# EAGLE board Headphone-Amplifier-ClassAB-alt4 (EAGLE 7.2.0)
4x4 - Three Transistor Headphone Amplifier - Class AB http://www.electronics-diy.com/4x4.php
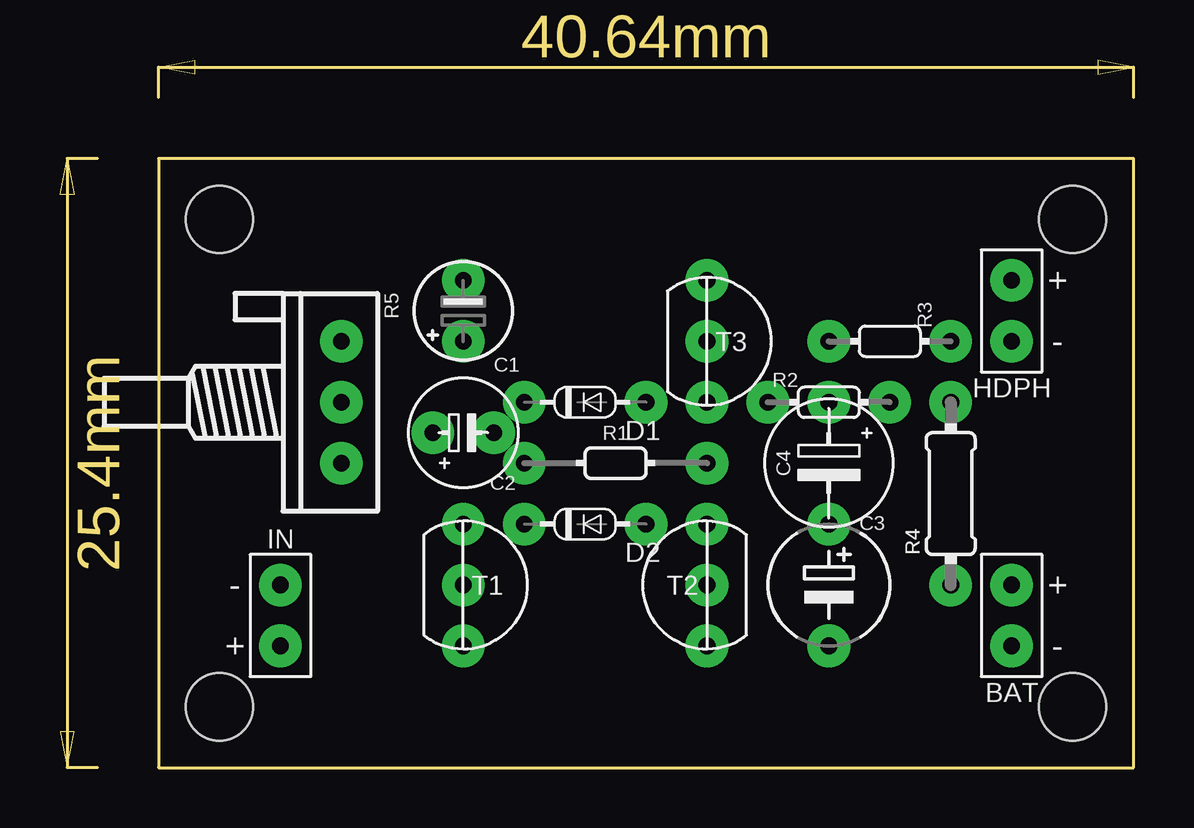
[diagram p0: board, top side]
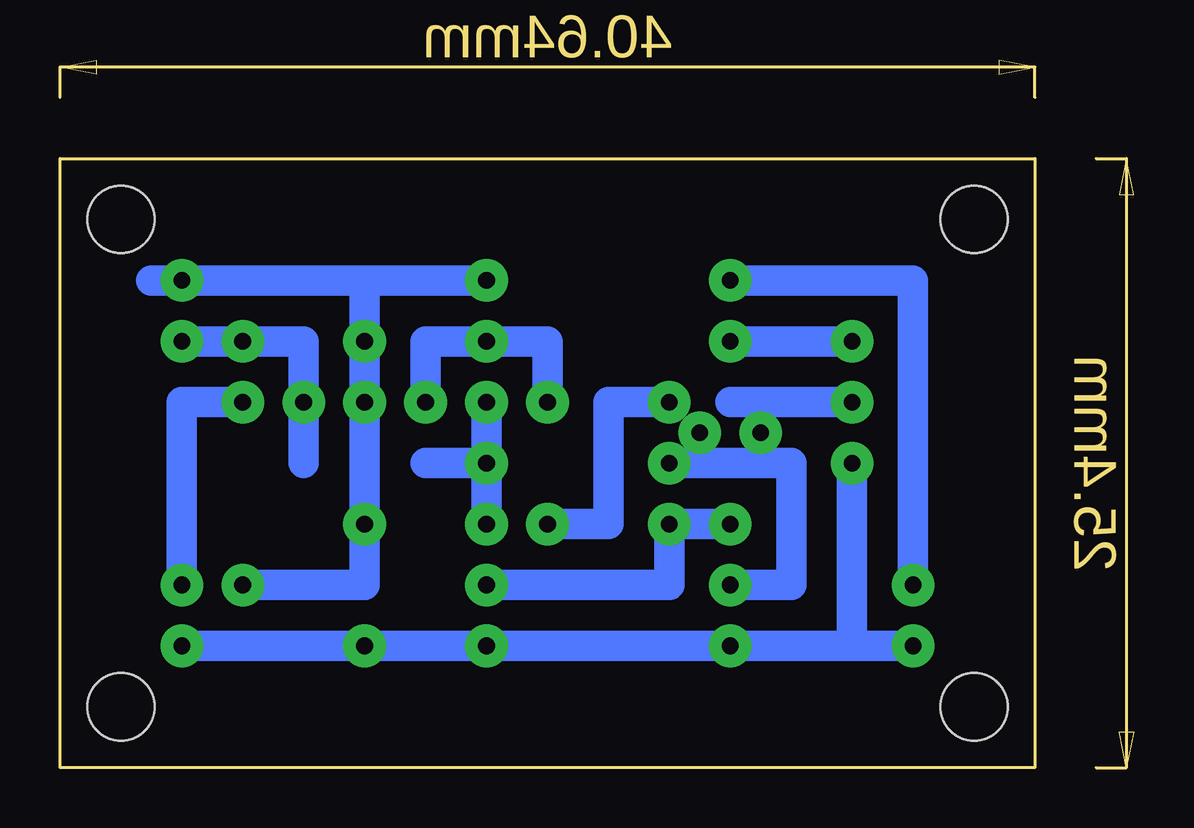
[diagram p1: board, bottom side, seen from below]

Size 40.64 x 25.4 mm. Coordinates in mm from the lower left corner, seen from the top.
Outline: 0,25.4 0,0 40.64,0 40.64,25.4 0,25.4
Copper layers (1*16): Top 0.035mm / dielectric 1.5mm / Bottom 0.035mm
Design rules "default": minimum track width 10mil, minimum drill 24mil, track to track 8mil, track to pad 8mil, pad to pad 8mil, via to via 8mil, smd to smd 8mil, copper to edge 40mil, drill to drill 8mil, minimum pad ring 10mil, minimum via ring 8mil, stop-mask expansion 4mil, vias tented up to drill 0mil, thermal gap 10mil
Net classes: 0 default: width 0.61 mm
Holes 2.8 mm at 2.54,22.86 2.54,2.54 38.1,22.86 38.1,2.54

## Footprints (pad centres in the part's own frame; a part is rotated, then mirrored left to right if it is on the bottom)
SPAD+- = drill 0.7 pad 1.778: 1 0,-1.27; 2 0,1.27
E2.5-4/V = drill 0.7 pad 1.778: + 0,1.27; - 0,-1.27
E2,5-4 = drill 0.7 pad 1.778: + 1.27,0; - -1.27,0
E5-5/V = drill 0.7 pad 1.778: + 0,2.54; - 0,-2.54
E5-4 = drill 0.7 pad 1.778: + -2.54,0; - 2.54,0
DO34-5 = drill 0.7 pad 1.778: A 2.54,0; C -2.54,0
0202/7 = drill 0.7 pad 1.778: 1 -3.81,0; 2 3.81,0
0202/5 = drill 0.7 pad 1.778: 1 -2.54,0; 2 2.54,0
0202/5-V = drill 0.7 pad 1.778: 1 0,2.54; 2 0,-2.54
0204/7 = drill 0.7 pad 1.778: 1 -3.81,0; 2 3.81,0
POT = drill 0.7 pad 1.778: A -2.54,0; E 2.54,0; S 0,0
TO92-CBE = drill 0.7 pad 1.778: B 0,0; C 0,2.54; E 0,-2.54

## Placement (x,y rotation side)
BAT  SPAD+-+-  [SPAD+-]  35.56,6.35 0 top
C1  4.7uF  [E2.5-4/V]  12.7,19.05 180 top
C2  4.7uF  [E2,5-4]  12.7,13.97 180 top
C3  100-1000uF  [E5-5/V]  27.94,7.62 0 top
C4  220uF  [E5-4]  27.94,12.7 270 top
D1  1N4148  [DO34-5]  17.78,15.24 0 top
D2  1N4148  [DO34-5]  17.78,10.16 0 top
HDPH  SPAD+-+-  [SPAD+-]  35.56,19.05 0 top
IN  SPAD+-+-  [SPAD+-]  5.08,6.35 180 top
R1  100k  [0202/7]  19.05,12.7 0 top
R2  330  [0202/5]  27.94,15.24 0 top
R3  100  [0202/5-V]  30.48,17.78 270 top
R4  22  [0204/7]  33.02,11.43 90 top
R5  100k  [POT]  7.62,15.24 270 top
T1  BC547  [TO92-CBE]  12.7,7.62 0 top
T2  BC557  [TO92-CBE]  22.86,7.62 180 top
T3  BC547  [TO92-CBE]  22.86,17.78 0 top

## Library data of the parts
BAT HDPH IN = pad
C1-C4 = c
D1 D2 = d
R1-R5 = r
T1-T3 = t

## Nets
GND: BAT.1 C3.- IN.2 R5.E T1.E T2.C
N$1: D1.A R2.1 T3.B
N$2: D2.C T1.C T2.B
N$3: D1.C D2.A
N$4: C4.- R1.2 T2.E T3.E
N$5: C1.+ R5.A
N$6: C2.- R5.S
N$7: C2.+ R1.1 T1.B
N$8: C3.+ HDPH.2 R3.2 R4.1 T3.C
N$9: C4.+ HDPH.1 R2.2 R3.1
N$10: C1.- IN.1
V+: BAT.2 R4.2

## Tracks (layer width: path | path; a pad name or v marks a point on that pad's centre or on a via)
GND
  Bottom 1.27: BAT.1 C3.- T2.C T1.E IN.2 7.62,5.08 R5.E
N$1
  Bottom 1.27: R2.1 25.4,17.78 T3.B 20.32,17.78 D1.A
N$2
  Bottom 1.27: T2.B 15.24,7.62 D2.C T1.C
N$3
  Bottom 1.27: D2.A 17.78,10.16 17.78,15.24 D1.C
N$4
  Bottom 1.27: R1.2 T3.E | 25.4,12.7 R1.2 | T2.E R1.2
N$5
  Bottom 1.27: R5.A C1.+
N$6
  Bottom 1.27: 12.7,15.24 R5.S
N$7
  Bottom 1.27: R1.1 12.7,12.7 10.16,12.7 10.16,7.62 T1.B
N$8
  Bottom 1.27: R4.1 27.94,7.62 C3.+ R3.2 27.94,20.32 | 27.94,20.32 T3.C | 27.94,20.32 HDPH.2 36.83,20.32
N$9
  Bottom 1.27: R3.1 30.48,17.78 R2.2 30.48,12.7 | 34.29,17.78 R3.1 | R3.1 HDPH.1
N$10
  Bottom 1.27: C1.- 5.08,20.32 IN.1
V+
  Bottom 1.27: BAT.2 35.56,15.24 R4.2